# EAGLE board BasePCB (EAGLE 9.2.2)
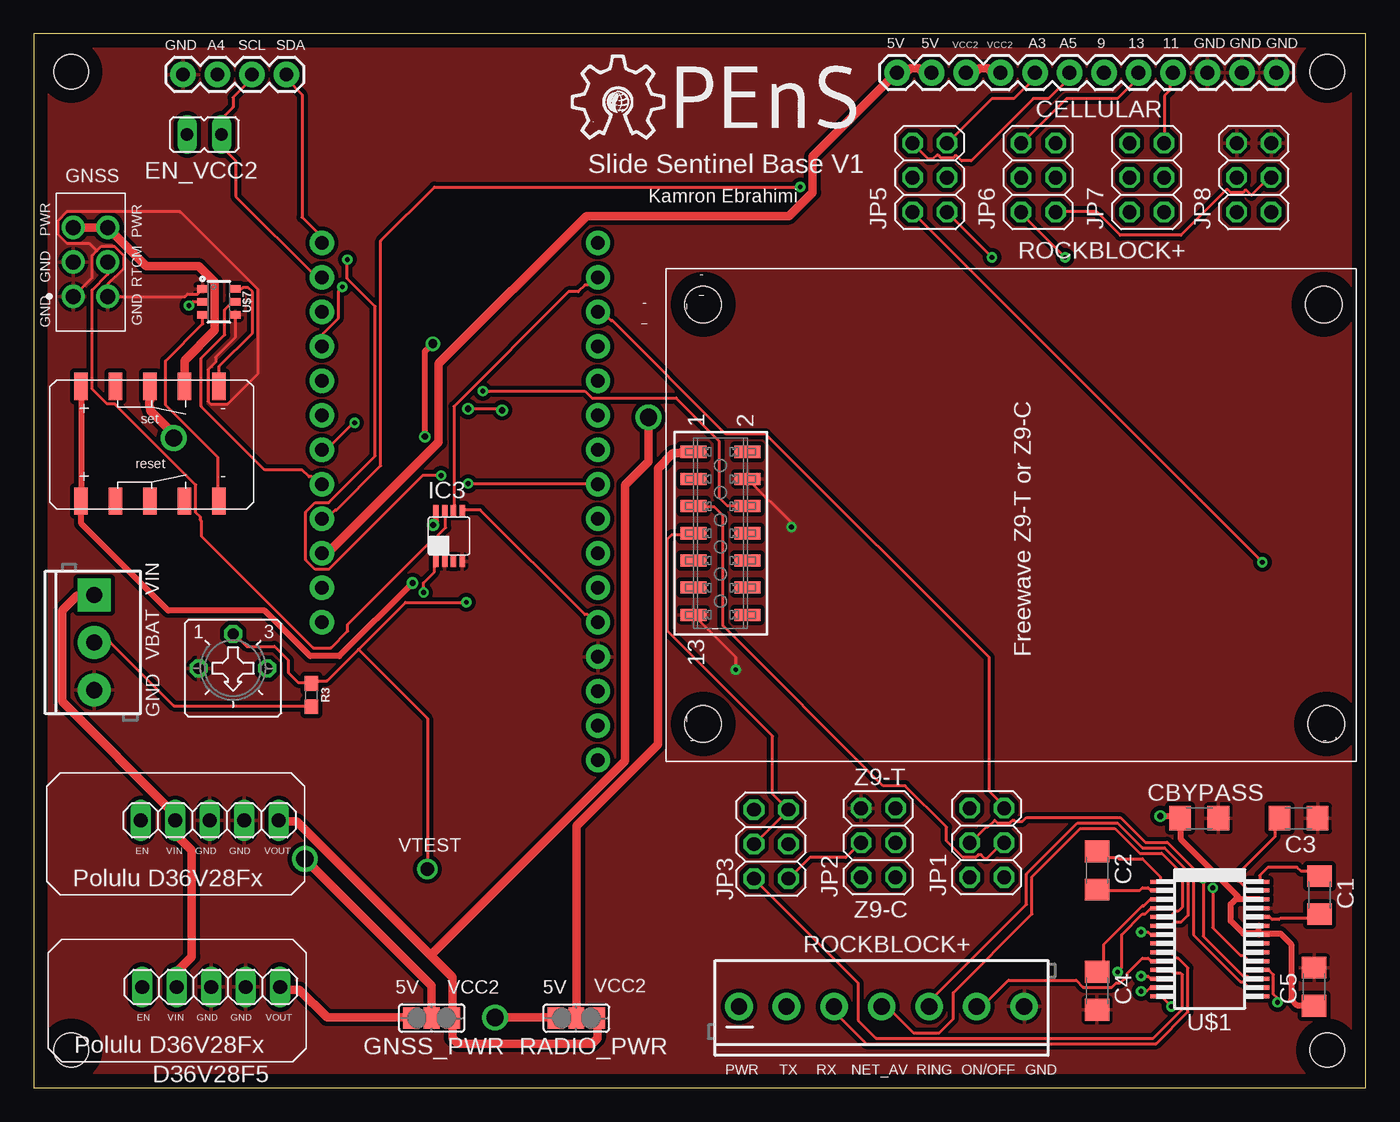
[diagram p0: board, top side]
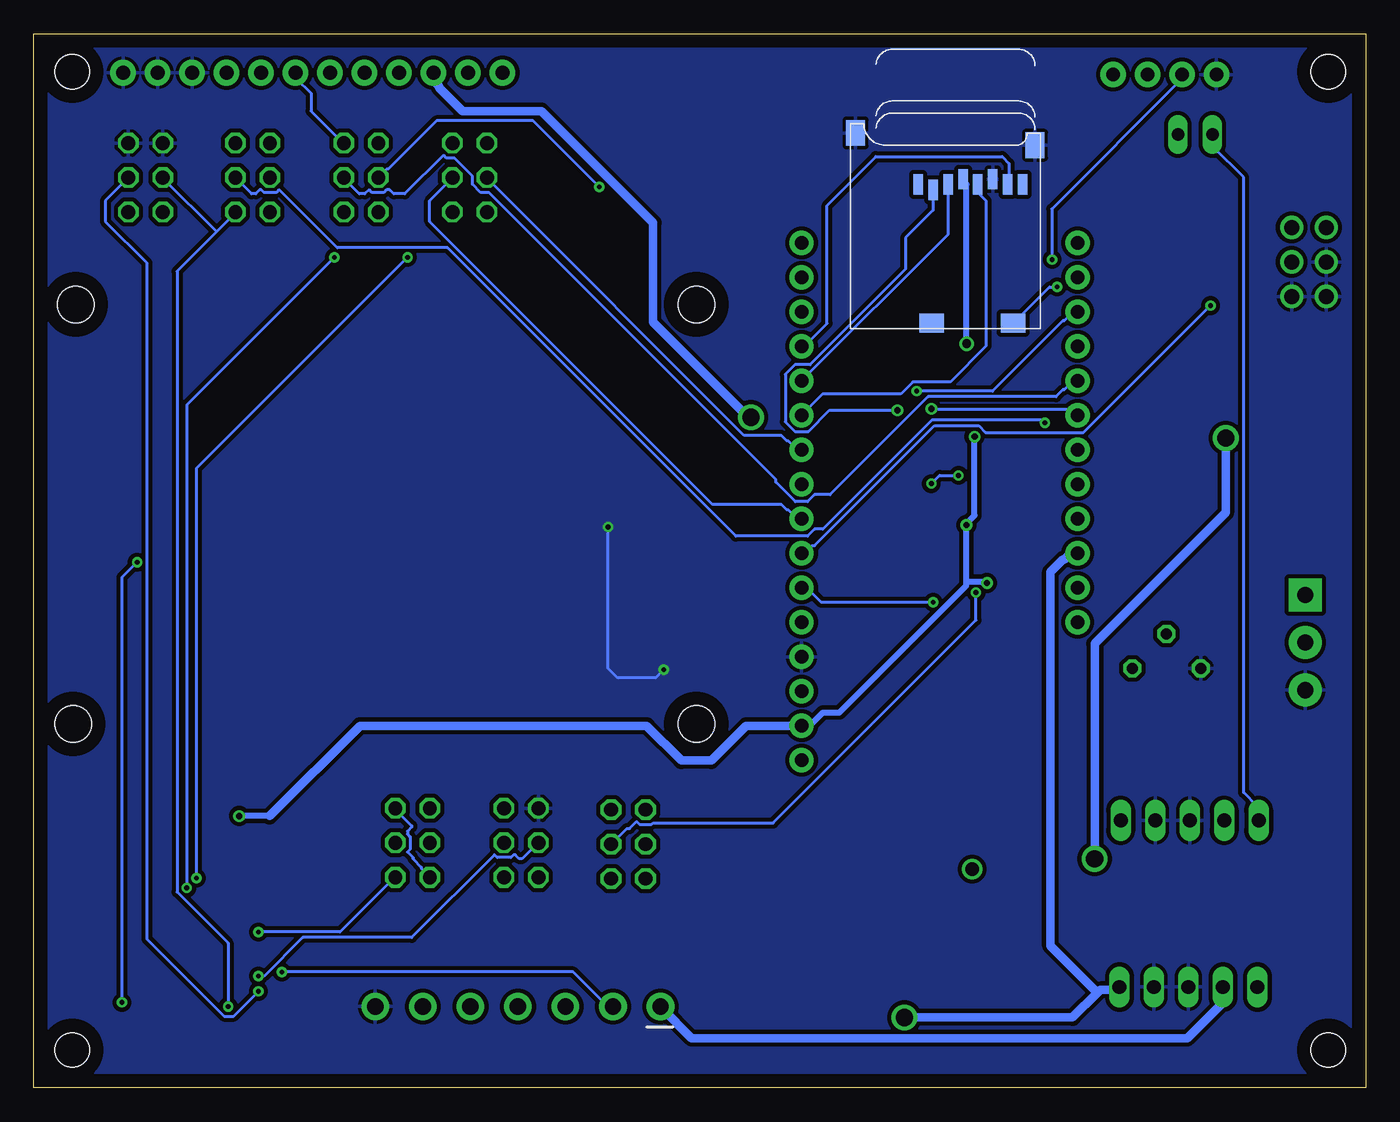
[diagram p1: board, bottom side, seen from below]

Size 98.05 x 77.61 mm. Coordinates in mm from the lower left corner, seen from the top.
Outline: 0,0 98.05,0 98.05,77.61 0,77.61 0,0
Copper layers (1*16): Top 0.035mm / dielectric 1.5mm / Bottom 0.035mm
Design rules "default *": minimum track width 6mil, minimum drill 0.35mm, track to track 6mil, track to pad 6mil, pad to pad 6mil, via to via 6mil, smd to smd 6mil, copper to edge 40mil, drill to drill 6mil, minimum pad ring 10mil, minimum via ring 8mil, stop-mask expansion 4mil, vias tented up to drill 30mil, thermal gap 10mil
Net classes: 0 default: width 0.203 mm, drill 0.203 mm, clearance 0.203 mm; 1 Power: width 0.635 mm, drill 1.27 mm, clearance 0.203 mm; 2 Power2: width 0.457 mm, drill 0.457 mm, clearance 0.203 mm
Holes 2.54 mm at 95.24,74.84 95.24,2.79 2.74,2.79 2.74,74.84

## Footprints (pad centres in the part's own frame; a part is rotated, then mirrored left to right if it is on the bottom)
C1206 = smd 1.6 x 1.8: 1 -1.4,0; 2 1.4,0
JP1 = drill 0.914 long: 1 0,-1.27; 2 0,1.27
SJ_2 = smd 1.168 x 1.6: 1 -1.524,0; 2 0,0; 3 1.524,0
DCT_R-PDSO-G8 = smd 0.4 x 0.8: 1 -0.975,-1.875; 2 -0.325,-1.875; 3 0.325,-1.875; 4 0.975,-1.875; 5 0.975,1.875; 6 0.325,1.875; 7 -0.325,1.875; 8 -0.975,1.875
1X04 = drill 1.016 pad 1.88: 1 0,0; 2 2.54,0; 3 5.08,0; 4 7.62,0
1X12 = drill 1.016 pad 1.88: 1 0,0; 2 2.54,0; 3 5.08,0; 4 7.62,0; 5 10.16,0; 6 12.7,0; 7 15.24,0; 8 17.78,0; 9 20.32,0; 10 22.86,0; 11 25.4,0; 12 27.94,0
SCREWTERMINAL-3.5MM-3 = drill 1.2 pad 2.413 square: 1 0,0 | drill 1.2 pad 2.413: 2 3.5,0; 3 7,0
2X03 = drill 1.016 octagon: 1 -2.54,-1.27; 2 -2.54,1.27; 3 0,-1.27; 4 0,1.27; 5 2.54,-1.27; 6 2.54,1.27
FEATHERWING = drill 1 pad 1.778: 1 6.35,1.27; 2 8.89,1.27; 3 11.43,1.27; 4 13.97,1.27; 5 16.51,1.27; 6 19.05,1.27; 7 21.59,1.27; 8 24.13,1.27; 9 26.67,1.27; 10 29.21,1.27; 11 31.75,1.27; 12 34.29,1.27; 13 36.83,1.27; 14 39.37,1.27; 15 41.91,1.27; 16 44.45,1.27; 17 44.45,21.59; 18 41.91,21.59; 19 39.37,21.59; 20 36.83,21.59; 21 34.29,21.59; 22 31.75,21.59; 23 29.21,21.59; 24 26.67,21.59; 25 24.13,21.59; 26 21.59,21.59; 27 19.05,21.59; 28 16.51,21.59
0603 = smd 1.1 x 1: 1 -0.85,0; 2 0.85,0
SCREWTERMINAL-3.5MM-7 = drill 1.2 pad 2.032: 1 0,0; 2 3.5,0; 3 7,0; 4 10.5,0; 5 14,0; 6 17.5,0; 7 21,0
SSOP-28 = smd 0.3 x 1.5: 1 -4.225,-3.625; 2 -3.575,-3.625; 3 -2.925,-3.625; 4 -2.275,-3.625; 5 -1.625,-3.625; 6 -0.975,-3.625; 7 -0.325,-3.625; 8 0.325,-3.625; 9 0.975,-3.625; 10 1.625,-3.625; 11 2.275,-3.625; 12 2.925,-3.625; 13 3.575,-3.625; 14 4.225,-3.625; 15 4.225,3.625; 16 3.575,3.625; 17 2.925,3.625; 18 2.275,3.625; 19 1.625,3.625; 20 0.975,3.625; 21 0.325,3.625; 22 -0.325,3.625; 23 -0.975,3.625; 24 -1.625,3.625; 25 -2.275,3.625; 26 -2.925,3.625; 27 -3.575,3.625; 28 -4.225,3.625
POLULU_D36V28FX = drill 1.016 long: EN 0.08,-3.5; GND -7.54,-3.5; GND2 -5,-3.5; VIN -2.46,-3.5; VOUT -10.08,-3.5
MICROSD = smd 0.7 x 1.5: 1 9,-10.64; 2 7.9,-10.24; 3 6.8,-10.64; 4 5.7,-11.04; 5 4.6,-10.64; 6 3.5,-11.04; 7 2.4,-10.64; 8 1.3,-10.64 | smd 1.8 x 1.4: CD1 2,-0.44; CD2 8,-0.44 | smd 1.4 x 1.9: MT1 0.4,-13.54; MT2 13.6,-14.44
HDRV6W64P254_2X3_1016X508X838B = drill 1.105 pad 1.705: 1 -2.54,1.27; 2 0,1.27; 3 2.54,1.27; 4 2.54,-1.27; 5 0,-1.27; 6 -2.54,-1.27
SOT26 = smd 0.55 x 0.8: GND1 -0.95,-1.2; GND2 0.95,1.2; IN1 0,1.2; IN2 0,-1.2; OUT1 -0.95,1.2; OUT2 0.95,-1.2
TQ2SS = smd 1 x 2: 2 -2.16,-4.418; 3 0.38,-4.418; 4 2.92,-4.418; 7 2.92,4.04; 8 0.38,4.04; 9 -2.16,4.04; +RST -4.7,-4.418; +SET -4.7,4.04; -RST 5.46,-4.418; -SET 5.46,4.04
CT6 = drill 0.813 octagon: A 2.515,0; E -2.515,0; S 0,-2.54
Z9-T/Z9-C = smd 0.89 x 1.91: 1 6.2,2; 2 6.2,-2; 3 4.2,2; 4 4.2,-2; 5 2.2,2; 6 2.2,-2; 7 0.2,2; 8 0.2,-2; 9 -1.8,2; 10 -1.8,-2; 11 -3.8,2; 12 -3.8,-2; 13 -5.8,2; 14 -5.8,-2 | hole 2.7: -13.842,1.282; 17.058,1.282; -13.842,-44.618; 17.058,-44.418

## Placement (x,y rotation side)
C1  .1uF  [C1206]  94.67,14.2 270 top
C2  .1uF  [C1206]  78.29,16.01 270 top
C3  .1uF  [C1206]  93.13,19.85 180 top
C4  .1uF  [C1206]  78.29,7.15 270 top
C5  .1uF  [C1206]  94.27,7.45 90 top
CBYPASS  .1uF  [C1206]  85.81,19.85 180 top
EN_VCC2  [JP1]  12.55,70.22 90 top
GNSS_PWR  [SJ_2]  29.29,5.14 0 top
IC3  741G53DCT  [DCT_R-PDSO-G8]  30.57,40.64 0 top
J1  [1X04]  10.98,74.63 0 top
J2  [1X12]  91.49,74.76 180 top
J4  [SCREWTERMINAL-3.5MM-3]  4.44,36.3 270 top
JP1  [2X03]  70.17,18.05 90 top
JP2  [2X03]  62.18,18.05 90 top
JP3  [2X03]  54.29,17.95 90 top
JP5  [2X03]  65.97,67.04 90 top
JP6  [2X03]  73.96,67.04 90 top
JP7  [2X03]  81.95,67.04 90 top
JP8  [2X03]  89.84,67.04 90 top
MS1  FEATHERWING  [FEATHERWING]  42.8,17.78 90 top
R3  [0603]  20.42,28.92 270 top
RADIO_PWR  [SJ_2]  39.94,5.14 0 top
ROCK_+  ROCKBLOCK+  [SCREWTERMINAL-3.5MM-7]  51.92,5.99 0 top
U$1  MAX3243  [SSOP-28]  86.58,10.96 270 top
U$2  OPENS-LOGO  [OPENS-LOGO]  39.32,66.14 0 top
U$3  POLULU_D36V28FX  [POLULU_D36V28FX]  8.05,3.93 180 top
U$4  MICROSD  [MICROSD]  23.95,55.88 180 bottom
U$5  GNSS_RECEIVER  [HDRV6W64P254_2X3_1016X508X838B]  4.16,60.82 90 top
U$7  DRDC3105  [SOT26]  13.62,57.89 270 top
U$8  TQ2SS  [TQ2SS]  8.17,47.63 0 top
U$9  CT6EP205  [CT6]  14.66,30.9 180 top
U$11  Z9-T/Z9-C  [Z9-T/Z9-C]  50.56,40.64 90 top
U$12  POLULU_D36V28FX  [POLULU_D36V28FX]  7.95,16.2 180 top

## Library data of the parts
C1-C5 CBYPASS = eagle-ltspice; SPICEMODEL: NONE; SPICEPREFIX: C
EN_VCC2 = jumper
GNSS_PWR RADIO_PWR = SparkFun-Retired
IC3 = 74xx-little-de
J1 = SparkFun-Connectors; PROD_ID: CONN-09696
J2 ROCK_+ = SparkFun-Connectors
J4 = SparkFun-Connectors; PROD_ID: CONN-08288; SF_ID: PRT-08235
JP1-JP3 JP5-JP8 = pinhead
MS1 U$4 = adafruit
R3 = SparkFun-Resistors; PROD_ID: RES-08361
U$1 = ftdi4
U$2 = opens-logo
U$3 U$5 U$7 U$8 U$11 U$12 = SlideSentinel
U$9 = tango

## Nets
3.3V_M0 [Power2]: C5.1 CBYPASS.2 IC3.8 MS1.2 U$1.22 U$1.23 U$1.26 U$4.4 U$8.+RST U$8.+SET
5: MS1.19 U$11.6
6: MS1.20 U$4.CD1
9: JP6.3 MS1.21
9_CELL_ONOFF: J2.6 JP6.5
9_ROCK: JP6.1 JP8.3 U$1.13
10: MS1.22 U$4.2
11: JP7.3 MS1.23
11_CELL_TX: J2.4 JP7.5
11_ROCK: JP7.1 JP8.4 U$1.14
12: MS1.24 U$7.IN1
13: JP6.4 MS1.25
13_CELL_RX: J2.5 JP6.6
13_ROCK: JP6.2 U$1.19
A0: IC3.5 MS1.5
A1: MS1.6 R3.1 U$9.S
A2: MS1.7 U$7.IN2
A3: JP5.3 MS1.8
A3_CELL_RINGAL: J2.8 JP5.5
A3_ROCK: JP5.1 U$1.17
A4: J1.2 MS1.9
A5: JP5.4 MS1.10
A5_CELL_NETAV: J2.7 JP5.6
A5_ROCK: JP5.2 U$1.18
C1+: C1.1 U$1.28
GND: C3.1 C4.2 C5.2 CBYPASS.1 IC3.2 IC3.4 J1.1 J2.1 J2.2 J2.3 J4.3 JP2.6 JP8.5 JP8.6 MS1.4 ROCK_+.7 U$1.25 U$3.GND U$3.GND2 U$4.6 U$4.MT1 U$4.MT2 U$5.1 U$5.2 U$5.6 U$7.GND1 U$7.GND2 U$9.A U$11.4 U$11.13 U$12.GND U$12.GND2
GNSS_PWR: U$5.3 U$5.4 U$8.7
MISO: MS1.13 U$4.7
MOSI: MS1.12 U$4.3
N$1 [Power]: GNSS_PWR.2 U$8.8
N$4: C2.1 U$1.1
N$5: C2.2 U$1.2
N$7: U$7.OUT2 U$8.-RST
N$8: U$7.OUT1 U$8.-SET
N$9: EN_VCC2.2 U$12.EN
N$10: C4.1 U$1.3
N$11: C1.2 U$1.24
N$13: C3.2 U$1.27
RADIO_PWR [Power]: RADIO_PWR.2 U$11.1
RADIO_RX_RS232: JP2.4 JP3.1 U$1.12
RADIO_RX_SIG: IC3.1 JP3.3
RADIO_TX: JP1.3 U$11.5
RADIO_TX_RS232: JP1.1 U$1.7
ROCK_NETAV: ROCK_+.4 U$1.5
ROCK_ONOFF: ROCK_+.6 U$1.10
ROCK_RINGAL: ROCK_+.5 U$1.6
ROCK_RX: ROCK_+.3 U$1.9
ROCK_TX: ROCK_+.2 U$1.4
RS232_TO_RADIO: JP3.2 U$1.11
RTCM_OUT: IC3.7 U$5.5
RX: JP1.2 JP1.5 MS1.14
RX_RADIO: JP3.4 JP3.5 U$11.7
RX_RS232: JP1.4 U$1.16
SCK: MS1.11 U$4.5
SCL: EN_VCC2.1 J1.3 MS1.18
SDA: J1.4 MS1.17
TX: IC3.6 MS1.15
VBAT: J4.2 R3.2
VCC [Power]: GNSS_PWR.1 J2.11 J2.12 MS1.26 RADIO_PWR.1 U$3.VOUT
VCC_2 [Power]: GNSS_PWR.3 J2.9 J2.10 RADIO_PWR.3 U$12.VOUT
VIN [Power]: J4.1 ROCK_+.1 U$3.VIN U$12.VIN

## Tracks (layer width: path | path; a pad name or v marks a point on that pad's centre or on a via)
3.3V_M0  (via drill 0.46, 0.65)
  Top 0.457: U$1.23 90.16,11.89 90.16,11.33 U$1.22 | 88.53,13.92 89.23,13.92 89.24,13.92 90.15,13.92 U$1.26 | 88.53,13.92 88.13,13.52 88.13,12.29 89.04,11.38 90.05,11.38 U$1.22 | C5.1 94.22,6.1 93,6.1 92.58,6.51 92.58,10.58 91.78,11.38 90.46,11.38 U$1.22 | U$8.+SET 3.49,51.61 3.49,43.28 U$8.+RST 3.49,42.98 3.49,41.55 9.89,35.15 17,35.15 20.36,31.8 22.49,31.8 v27.87,37.19 | v29.4,41.45 29.6,41.66 29.6,42.47 IC3.8 | v28.79,47.95 28.79,54.24 29.35,54.8 v29.38,54.8 | v82.94,20.02 84.26,20.02 CBYPASS.2 84.46,19.81 84.46,18.29 88.68,14.07 88.53,13.92
  Bottom 0.457: 29.4,37.29 29.4,36.98 38.74,27.64 39.96,27.64 40.88,26.72 41.49,26.72 MS1.2 41.69,26.72 | 29.4,37.29 v29.4,41.45 29.3,41.66 28.79,42.16 v28.79,47.95 | U$4.4 29.7,66.85 29.38,66.53 v29.38,54.8 | v27.87,37.19 28.18,37.19 28.28,37.29 29.4,37.29 | 80.71,20.02 v82.94,20.02
  Bottom 0.635: 80.71,20.02 74.05,26.67 52.94,26.67 50.39,24.11 48.16,24.11 45.61,26.67 MS1.2
5  (via drill 0.35)
  Top 0.203: v33.05,51.31 40.57,51.31 41.08,50.8 47.28,50.8 50.43,47.65 50.43,43.48 51.04,42.88 52.46,42.88 U$11.6
  Bottom 0.203: v33.05,51.31 27.47,51.31 22.29,56.49 22.18,56.49 21.57,57.1 21.27,57.1 MS1.19
6  (via drill 0.35)
  Top 0.203: v22.72,58.99 22.4,58.67 22.4,56.66 21.21,55.46 MS1.20
  Bottom 0.203: U$4.CD1 23.28,58.99 v22.72,58.99
9
  Bottom 0.203: JP6.3 75.22,66.95 74.1,65.84 73.69,65.84 73.39,66.14 73.19,65.94 72.27,65.94 72.07,66.14 71.87,66.14 71.56,65.84 70.75,65.84 67.9,68.68 67.7,68.48 67.09,68.48 65.77,67.16 65.77,66.55 65.16,65.94 64.55,65.94 43.42,44.81 43.42,44.6 42,43.18 41.08,43.18 40.57,43.69 39.43,43.69 32.22,50.9 22.79,50.9 22.29,51.41 22.18,51.41 21.57,52.02 21.27,52.02 MS1.21
9_CELL_ONOFF
  Bottom 0.203: JP6.5 75.32,69.6 77.66,71.93 77.66,73.25 78.77,74.37 78.77,74.68 J2.6
9_ROCK  (via drill 0.35)
  Top 0.203: v81.52,7.11 81.92,7.11 82.23,7.42 82.94,7.42 U$1.13 | JP6.1 75.32,64.52 78.27,64.52 79.99,62.79 84.46,62.79 87.82,66.14 87.92,66.14 88.12,65.94 89.04,65.94 89.24,66.14 89.65,65.73 90.87,66.95 91.07,66.95 JP8.3
  Bottom 0.203: v81.52,7.11 83.35,5.28 84.06,5.28 89.75,10.97 89.75,60.76 92.8,63.8 92.8,65.33 91.17,66.95 JP8.3
10  (via drill 0.46)
  Top 0.203: v34.48,49.9 34.38,50 v31.98,50
  Bottom 0.203: U$4.2 31.85,64.63 33.88,62.6 33.88,60.3 40.91,53.26 42.02,53.26 42.72,52.56 42.72,49.04 42.02,48.34 41.03,48.34 39.47,49.9 v34.48,49.9 | v31.98,50 21.68,50 MS1.22
11  (via drill 0.35)
  Top 0.203: v23.61,48.97 23.5,48.97 21.57,47.04 21.27,47.04 MS1.23
  Bottom 0.203: v23.61,48.97 23.81,49.17 31.94,49.17 39.96,41.15 40.57,41.15 41.08,40.64 46.37,40.64 67.6,61.87 75.73,61.87 79.99,66.14 80.2,65.94 81.11,65.94 81.31,66.14 81.42,66.14 81.72,65.84 82.03,65.84 83.14,66.95 JP7.3
11_CELL_TX
  Top 0.203: JP7.5 83.25,69.6 83.25,73.05 83.65,73.46 83.65,74.47 83.85,74.68 J2.4
11_ROCK  (via drill 0.35)
  Top 0.203: v83.75,5.99 83.04,6.71 U$1.14
  Bottom 0.203: v83.75,5.99 83.75,10.67 87.51,14.43 87.51,60.15 84.62,63.04 | 84.62,63.04 83.25,64.41 JP7.1 | 84.62,63.04 88.53,66.95 JP8.4
12
  Top 0.203: U$7.IN1 14.77,57.81 14.56,57.81 14.05,57.3 14.05,55.47 12.33,53.75 12.33,50.19 17,45.52 19.75,45.52 20.25,45.01 20.46,45.01 20.96,44.5 21.17,44.5 MS1.24
13  (via drill 0.35)
  Top 0.203: v56.42,66.34 29.5,66.34 25.54,62.38 25.54,45.82 22.29,42.57 22.18,42.57 21.57,41.96 21.27,41.96 MS1.25
  Bottom 0.203: v56.42,66.34 61.3,71.22 68.41,71.22 71.97,67.67 72.07,67.67 72.68,67.06 JP6.4
13_CELL_RX
  Top 0.203: JP6.6 72.78,69.6 76.03,72.85 79.79,72.85 81.31,74.37 81.31,74.68 J2.5
13_ROCK  (via drill 0.35)
  Top 0.203: v86.8,14.73 86.8,11.79 88.83,9.75 89.04,9.75 89.44,9.35 90.15,9.35 U$1.19 | v75.93,61.16 72.68,64.41 JP6.2
  Bottom 0.203: v86.8,14.73 86.8,50.29 v75.93,61.16
A0
  Top 0.203: IC3.5 31.63,42.57 32.85,42.57 40.57,34.85 40.78,34.85 41.29,34.34 41.49,34.34 MS1.5
A1  (via drill 0.35, 1)
  Top 0.203: U$9.S 14.67,33.53 15.68,32.51 17.71,32.51 18.73,31.5 18.73,30.58 19.44,29.87 20.36,29.87 R3.1 20.36,29.97 21.57,29.97 23.89,32.29 | v31.84,35.76 27.37,35.76 23.89,32.29 | 23.89,32.29 28.98,27.2 v28.98,16.1
  Bottom 0.203: v31.84,35.76 40.07,35.76 41.08,36.78 41.49,36.78 MS1.6
A2  (via drill 0.35)
  Top 0.203: v11.41,57.61 11.72,57.91 12.33,57.91 U$7.IN2
  Bottom 0.203: v11.41,57.61 20.76,48.26 27.98,48.26 28.48,48.77 31.73,48.77 40.57,39.93 40.78,39.93 41.29,39.42 41.49,39.42 MS1.7
A3
  Bottom 0.203: JP5.3 67.29,66.95 68.92,65.33 68.92,63.8 48.09,42.98 43.01,42.98 42.61,42.57 42.5,42.57 41.89,41.96 41.59,41.96 MS1.8
A3_CELL_RINGAL
  Top 0.203: JP5.5 67.29,69.6 70.55,72.85 72.17,72.85 73.69,74.37 73.69,74.68 J2.8
A3_ROCK  (via drill 0.35)
  Top 0.203: v86.09,15.44 86.09,11.18 89.04,8.23 89.34,8.23 89.44,8.13 90.15,8.13 U$1.17 | v70.55,61.16 67.29,64.41 JP5.1
  Bottom 0.203: v86.09,15.44 86.09,45.62 v70.55,61.16
A4  (via drill 0.35)
  Top 0.203: MS1.9 32.03,44.45 v31.98,44.5 | v23.08,61 23.08,59.6 25.13,57.54 25.13,46.53 21.7,43.1 20.71,43.1 20.01,42.4 20.01,38.88 20.71,38.18 21.7,38.18 28.62,45.1 v29.98,45.1
  Bottom 0.203: J1.2 13.55,74.57 13.55,74.27 23.1,64.72 23.1,61.02 v23.08,61 | v31.98,44.5 31.38,45.1 v29.98,45.1
A5
  Bottom 0.203: JP5.4 64.65,66.95 45.76,48.06 43.01,48.06 42.61,47.65 42.5,47.65 41.89,47.04 41.59,47.04 MS1.10
A5_CELL_NETAV
  Top 0.203: JP5.6 64.75,69.49 65.87,68.38 66.18,68.38 66.48,68.68 66.58,68.68 66.79,68.48 67.7,68.48 67.9,68.68 68.31,68.28 69.02,68.28 73.59,72.85 74.71,72.85 76.23,74.37 76.23,74.68 J2.7
A5_ROCK  (via drill 0.35)
  Top 0.203: v91.58,6.3 91.58,6.6 91.27,6.91 91.27,8.33 90.97,8.64 90.26,8.64 U$1.18 | v90.46,38.71 64.75,64.41 JP5.2
  Bottom 0.203: v91.58,6.3 91.58,37.59 v90.46,38.71
C1+
  Top 0.203: U$1.28 90.26,15.24 90.26,15.65 90.87,16.26 93,16.26 93.3,15.95 94.32,15.95 94.62,15.65 C1.1
GND  (via drill 0.35)
  Top 0.203: 4.62,61.65 4.28,61.3 4.28,59.67 U$5.1 | 4.62,61.65 4.95,61.98 5.91,61.98 6.59,61.3 6.59,60.34 5.43,59.19 U$5.6 11.12,58.28 11.31,58.47 12.05,58.47 U$7.GND1 | U$7.GND2 14.82,55.24 13.38,53.8 13.38,53.44 12.82,52.88 12.82,50.54 13,50.37 14.25,50.37 16.49,52.61 16.49,58.79 10.77,64.52 2.42,64.52 1.74,63.84 1.74,62.88 2.42,62.21 4.07,62.21 4.62,61.65 | U$11.13 51.68,31.72 v51.68,30.8 | U$11.4 55.78,41.62 v55.78,41.3
  Bottom 0.203: v51.68,30.8 52.28,30.2 55.08,30.2 55.78,30.9 v55.78,41.3
  pour Top (isolate 0.305): 0,77.62 98.11,77.62 98.11,0 0,0
  pour Bottom (isolate 0.305): 0,77.62 98.08,77.62 98.08,0 0,0
GNSS_PWR
  Top 0.61: U$8.7 11.09,53.57 13.32,55.81 13.32,59.33 12.13,60.52 8.28,60.52 U$5.4 U$5.3
MISO
  Bottom 0.203: U$4.7 26.25,66.55 26.25,68.07 26.76,68.58 36.06,68.58 39.66,64.98 39.66,56.29 41.29,54.66 41.49,54.66 MS1.13
MOSI
  Bottom 0.203: U$4.3 30.75,62.85 MS1.12
N$1  (via drill 1.27)
  Top 0.635: v19.95,16.87 29.3,7.52 29.3,5.18 GNSS_PWR.2 | v10.3,47.85 10.3,48.16 8.57,49.89 8.57,50.09 8.47,50.19 8.47,50.49 8.57,50.6 8.57,51.61 U$8.8
  Bottom 0.635: v19.95,16.87 19.95,32.72 10.3,42.37 v10.3,47.85
N$4
  Top 0.203: U$1.1 82.94,15.24 82.94,15.54 81.62,16.87 79.89,16.87 79.79,16.97 78.77,16.97 78.37,17.37 C2.1
N$5
  Top 0.203: U$1.2 82.94,14.53 82.23,14.53 82.03,14.73 81.62,14.73 81.42,14.53 78.37,14.53 C2.2
N$7
  Top 0.203: U$7.OUT2 12.43,56.9 12.43,56.28 9.69,53.53 9.69,50.29 13.55,46.43 13.55,43.28 U$8.-RST
N$8
  Top 0.203: U$7.OUT1 14.87,58.83 15.28,58.83 15.38,58.93 15.78,58.93 16.09,58.62 16.09,55.58 13.65,53.14 13.65,51.71 U$8.-SET
N$9
  Bottom 0.203: EN_VCC2.2 11.21,70.21 11.21,69.29 8.98,67.06 8.98,21.74 7.96,20.73 7.96,19.71 U$12.EN
N$10
  Top 0.203: U$1.3 82.94,13.92 82.23,13.92 81.72,13.41 81.62,13.41 78.77,10.57 78.77,9.04 78.37,8.64 C4.1
N$11
  Top 0.203: U$1.24 90.26,12.6 90.97,12.6 91.17,12.39 91.68,12.39 91.78,12.5 94.42,12.5 94.62,12.7 C1.2
N$13
  Top 0.203: U$1.27 90.15,14.53 89.44,14.53 88.73,15.24 88.63,15.24 88.53,15.34 88.53,15.65 91.37,18.49 91.37,19.51 91.68,19.81 C3.2
RADIO_PWR
  Top 0.635: RADIO_PWR.2 39.96,5.18 39.96,19.3 45.96,25.3 45.96,45.62 47.08,46.74 47.58,46.74 47.69,46.84 48.5,46.84 U$11.1
RADIO_RX_RS232  (via drill 0.35)
  Top 0.203: v81.52,8.23 82.03,8.23 82.23,8.03 82.94,8.03 U$1.12 | JP3.1 55.61,15.44 57.13,16.97 59.78,16.97 60.89,18.09 JP2.4
  Bottom 0.203: v81.52,8.23 81.11,8.23 78.27,11.07 70.24,11.07 64.14,17.17 63.94,16.97 62.93,16.97 62.72,17.17 62.62,17.17 62.32,16.87 62.11,16.87 60.99,17.98 JP2.4
RADIO_RX_SIG  (via drill 0.35)
  Top 0.203: v28.69,36.47 28.69,37.19 29.5,38 29.5,38.71 IC3.1
  Bottom 0.203: v28.69,36.47 28.69,34.44 43.62,19.51 52.46,19.51 52.56,19.41 53.48,19.41 53.68,19.61 54.19,19.1 54.39,19.1 55.51,17.98 JP3.3
RADIO_TX
  Top 0.203: U$11.5 48.6,42.77 50.12,42.77 50.73,42.16 50.73,34.04 62.52,22.25 64.14,22.25 67.19,19.2 67.19,18.19 68.41,16.97 69.33,16.97 69.53,17.17 69.73,17.17 70.04,16.87 70.14,16.87 71.36,18.09 JP1.3
RADIO_TX_RS232  (via drill 0.35)
  Top 0.203: v81.52,11.48 82.03,11.48 82.23,11.28 82.94,11.28 U$1.7
  Bottom 0.203: v81.52,11.48 75.52,11.48 71.46,15.54 JP1.1
ROCK_NETAV
  Top 0.203: U$1.5 83.04,12.6 83.65,12.6 84.06,13.01 84.26,13.01 84.57,13.31 84.57,15.75 83.04,17.27 81.42,17.27 79.59,19.1 77.05,19.1 73.49,15.54 73.49,12.8 67.7,7.01 67.7,5.08 66.68,4.06 64.75,4.06 62.93,5.89 62.42,5.89 ROCK_+.4
ROCK_ONOFF
  Top 0.203: U$1.10 82.94,9.35 82.23,9.35 82.03,9.55 81.62,9.55 80.5,8.43 80.5,8.23 79.99,7.72 79.69,7.72 79.38,7.42 77.25,7.42 76.74,7.92 71.76,7.92 69.83,5.99 69.43,5.99 ROCK_+.6
ROCK_RINGAL
  Top 0.203: U$1.6 83.04,11.99 83.75,11.99 83.96,12.19 84.46,12.19 84.97,12.7 84.97,15.95 83.25,17.68 81.62,17.68 79.79,19.51 76.84,19.51 73.09,15.75 73.09,13.51 65.97,6.4 65.97,5.99 ROCK_+.5
ROCK_RX
  Top 0.203: U$1.9 83.04,9.96 83.65,9.96 83.75,9.86 83.85,9.86 84.16,9.55 84.26,9.55 84.97,8.84 84.97,5.59 82.64,3.25 61.3,3.25 58.96,5.59 58.96,5.89 ROCK_+.3
ROCK_TX  (via drill 0.35)
  Top 0.203: v79.79,8.53 80.1,8.84 80.1,11.28 81.62,12.8 81.82,12.8 82.23,13.21 82.94,13.21 U$1.4
  Bottom 0.203: v79.79,8.53 58.35,8.53 55.81,5.99 55.51,5.99 ROCK_+.2
RS232_TO_RADIO
  Top 0.203: U$1.11 83.04,8.64 83.75,8.64 83.96,8.43 84.46,8.43 84.57,8.33 84.57,5.79 82.43,3.66 62.01,3.66 60.69,4.98 60.69,7.72 53.07,15.34 JP3.2
RTCM_OUT
  Top 0.203: IC3.7 30.31,42.47 30.31,41.25 29.09,40.03 28.99,40.03 23.1,34.14 23.1,33.63 21.88,32.41 20.56,32.41 12.33,40.64 12.33,41.76 12.23,41.86 12.23,42.06 11.92,42.37 11.92,44.4 5.96,50.37 5.38,50.37 4.28,51.47 4.28,58.76 5.43,59.92 U$5.5
RX
  Top 0.203: MS1.14 41.59,57.1 41.89,57.1 42.5,56.49 42.61,56.49 50.94,48.16 53.88,48.16 70.34,31.7 70.34,21.84 71.36,20.83 71.36,20.62 JP1.5
  Bottom 0.203: JP1.2 68.92,15.54 69.53,16.15 69.53,16.26 70.14,16.87 70.14,16.97 70.55,17.37 70.34,17.58 70.34,18.49 70.55,18.69 70.55,18.9 70.24,19.2 70.24,19.3 71.46,20.52 JP1.5
RX_RADIO
  Top 0.203: U$11.7 48.5,40.74 46.97,40.74 46.67,40.44 46.67,33.63 54.39,25.91 54.39,21.64 55.51,20.52 JP3.5 55.51,20.42 53.07,17.98 JP3.4
RX_RS232
  Top 0.203: U$1.16 90.15,7.42 89.44,7.42 89.04,7.82 88.83,7.82 85.38,11.28 85.38,16.15 83.45,18.09 81.82,18.09 79.99,19.91 73.09,19.91 72.78,19.61 72.27,19.61 72.17,19.71 72.07,19.71 71.87,19.51 70.95,19.51 70.75,19.71 70.24,19.2 70.14,19.2 68.92,17.98 JP1.4
SCK
  Bottom 0.203: U$4.5 28.55,65.92 27.95,65.32 27.95,54.63 30.59,51.99 33.34,51.99 34.23,51.1 39.98,51.1 41.53,49.55 MS1.11
SCL
  Top 0.203: J1.3 15.99,74.57 15.99,74.27 14.67,72.95 14.67,72.24 13.85,71.42 13.85,70.31 EN_VCC2.1 13.85,70.21 13.85,69.29 14.87,68.28 14.87,65.63 20.76,59.74 21.17,59.74 MS1.18
SDA
  Top 0.203: MS1.17 21.17,62.28 21.17,62.69 19.75,64.11 19.75,73.15 18.63,74.27 18.63,74.57 J1.4
TX
  Top 0.203: IC3.6 30.92,42.57 30.92,50.19 39.35,58.62 40.07,58.62 40.57,59.13 40.78,59.13 41.29,59.64 41.49,59.64 MS1.15
VBAT
  Top 0.203: R3.2 20.36,28.14 10.3,28.14 5.62,32.82 4.51,32.82 J4.2
VCC  (via drill 1.27)
  Top 0.635: J2.11 66.07,74.78 65.47,74.78 65.16,75.08 64.55,75.08 64.45,74.98 64.35,74.98 64.14,74.78 63.64,74.78 J2.12 63.33,74.57 57.34,68.58 57.34,65.94 55.61,64.21 40.67,64.21 29.8,53.34 29.8,47.55 21.68,39.42 21.27,39.42 MS1.26 | GNSS_PWR.1 27.67,5.18 21.57,5.18 19.54,7.21 18.43,7.21 18.22,7.42 U$3.VOUT | v33.95,5.18 38.34,5.18 RADIO_PWR.1
  Bottom 0.635: v33.95,5.18 21.57,5.18 19.75,7.01 | 19.75,7.01 19.54,7.21 18.43,7.21 18.22,7.42 U$3.VOUT | 19.75,7.01 23.2,10.46 23.2,38 22.29,38.91 22.18,38.91 21.78,39.32 21.27,39.32 MS1.26
VCC_2  (via drill 1.27)
  Top 0.635: J2.10 68.72,74.78 69.22,74.78 69.43,74.98 69.53,74.98 69.63,75.08 70.24,75.08 70.55,74.78 71.15,74.78 J2.9 | RADIO_PWR.3 41.49,5.08 41.49,3.66 41.08,3.25 31.23,3.25 30.82,3.66 30.82,5.08 GNSS_PWR.3 30.82,5.38 30.82,8.13 29.19,9.75 | 29.19,9.75 19.34,19.61 18.12,19.61 U$12.VOUT | v45.25,49.38 45.25,46.13 43.52,44.4 43.52,28.3 43.52,24.08 29.19,9.75
  Bottom 0.635: v45.25,49.38 45.45,49.38 52.46,56.39 52.46,63.7 60.69,71.93 66.48,71.93 68.21,73.66 68.21,73.76 68.61,74.17 68.61,74.68 J2.10
VIN
  Top 0.635: U$3.VIN 10.6,7.52 10.6,8.64 11.62,9.65 11.62,17.48 10.4,18.69 U$12.VIN 10.41,19.9 10.3,20.22 2.07,28.45 2.07,35.15 3.19,36.27 4.4,36.27 J4.1
  Bottom 0.635: ROCK_+.1 51.85,5.89 49.62,3.66 13.14,3.66 10.6,6.2 10.6,7.42 U$3.VIN

## Text on the board
tNames: 5V | 5V | VCC2 | VCC2 | A3 | A5 | 9 | 13 | 11 | GND | GND | GND | GND | A4 | SCL | SDA | CELLULAR | GNSS | Slide Sentinel Base V1 | PWR | PWR | Kamron Ebrahimi | GND | RTCM | ROCKBLOCK+ | GND | GND | VIN | VBAT | GND | Z9-T | VTEST | Z9-C | ROCKBLOCK+ | 5V | VCC2 | 5V | VCC2 | PWR | TX | RX | NET_AV | RING | ON/OFF | GND | D36V28F5